# EAGLE board WiiSPii_Rev1.4 (EAGLE 9.6.1), part 1 of 2
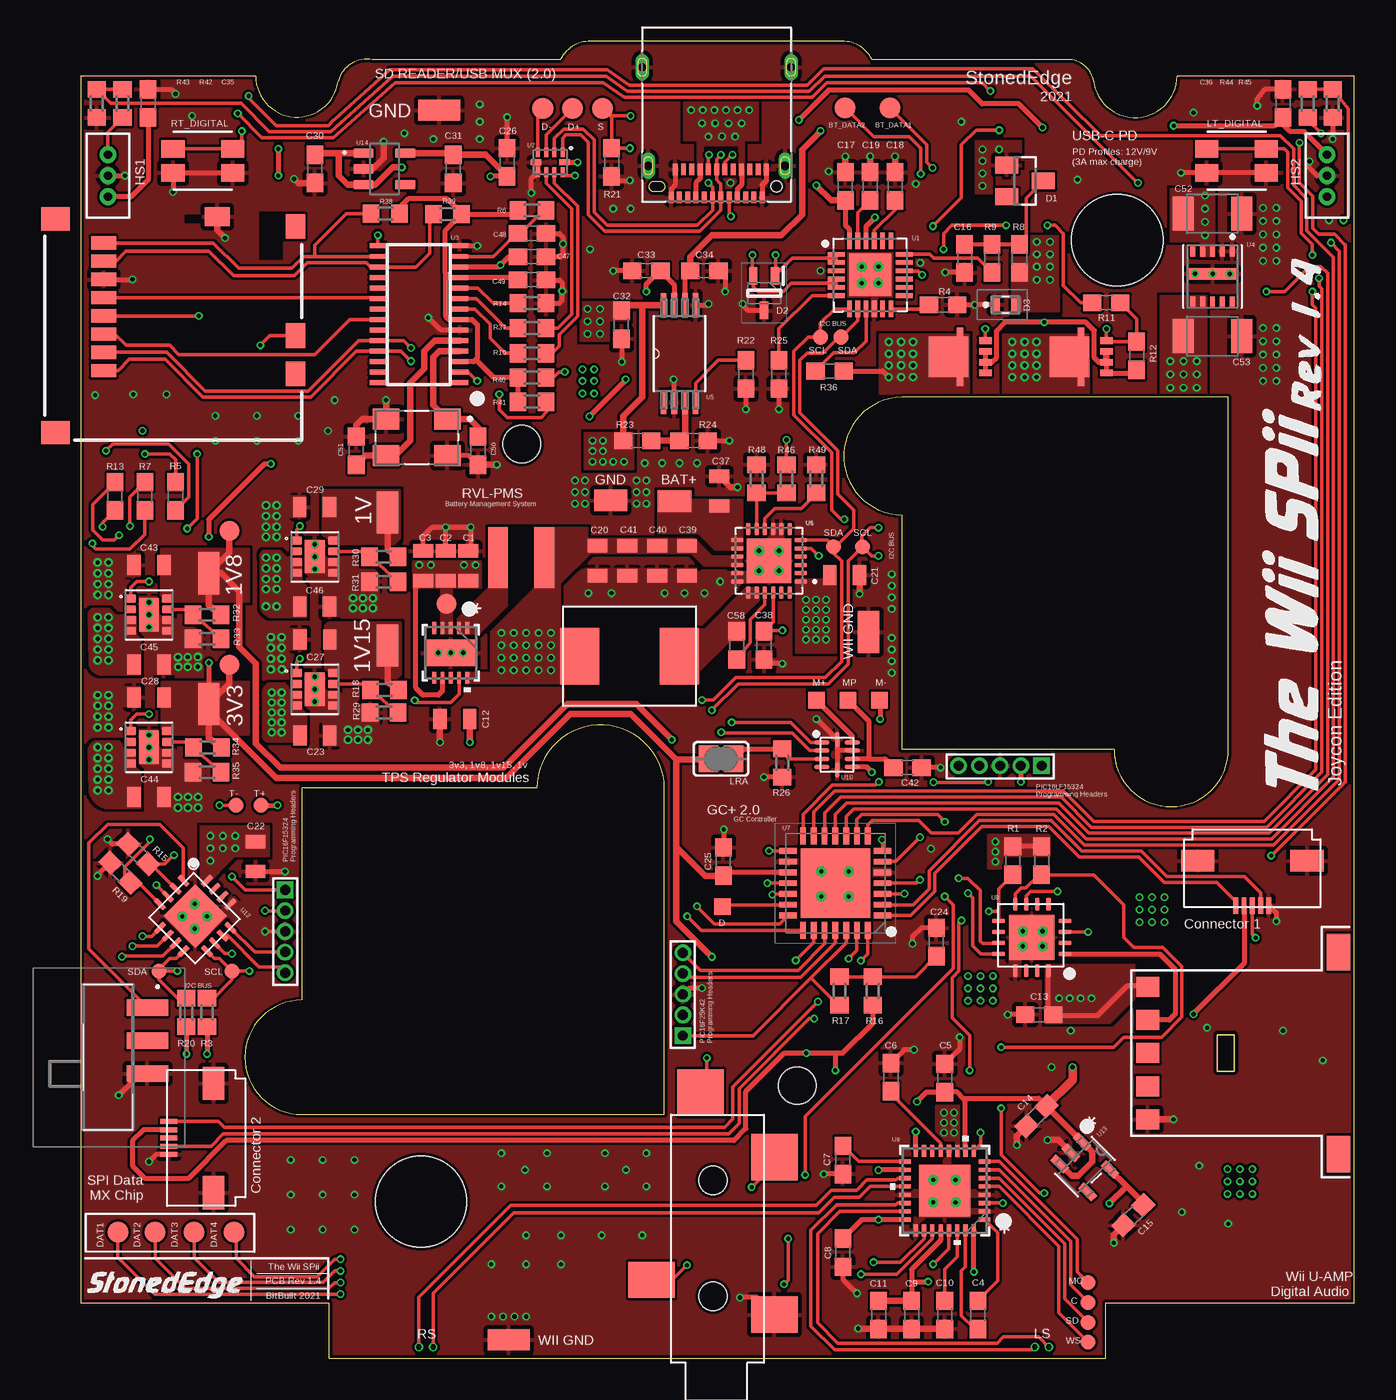
[diagram p0: board, top side]
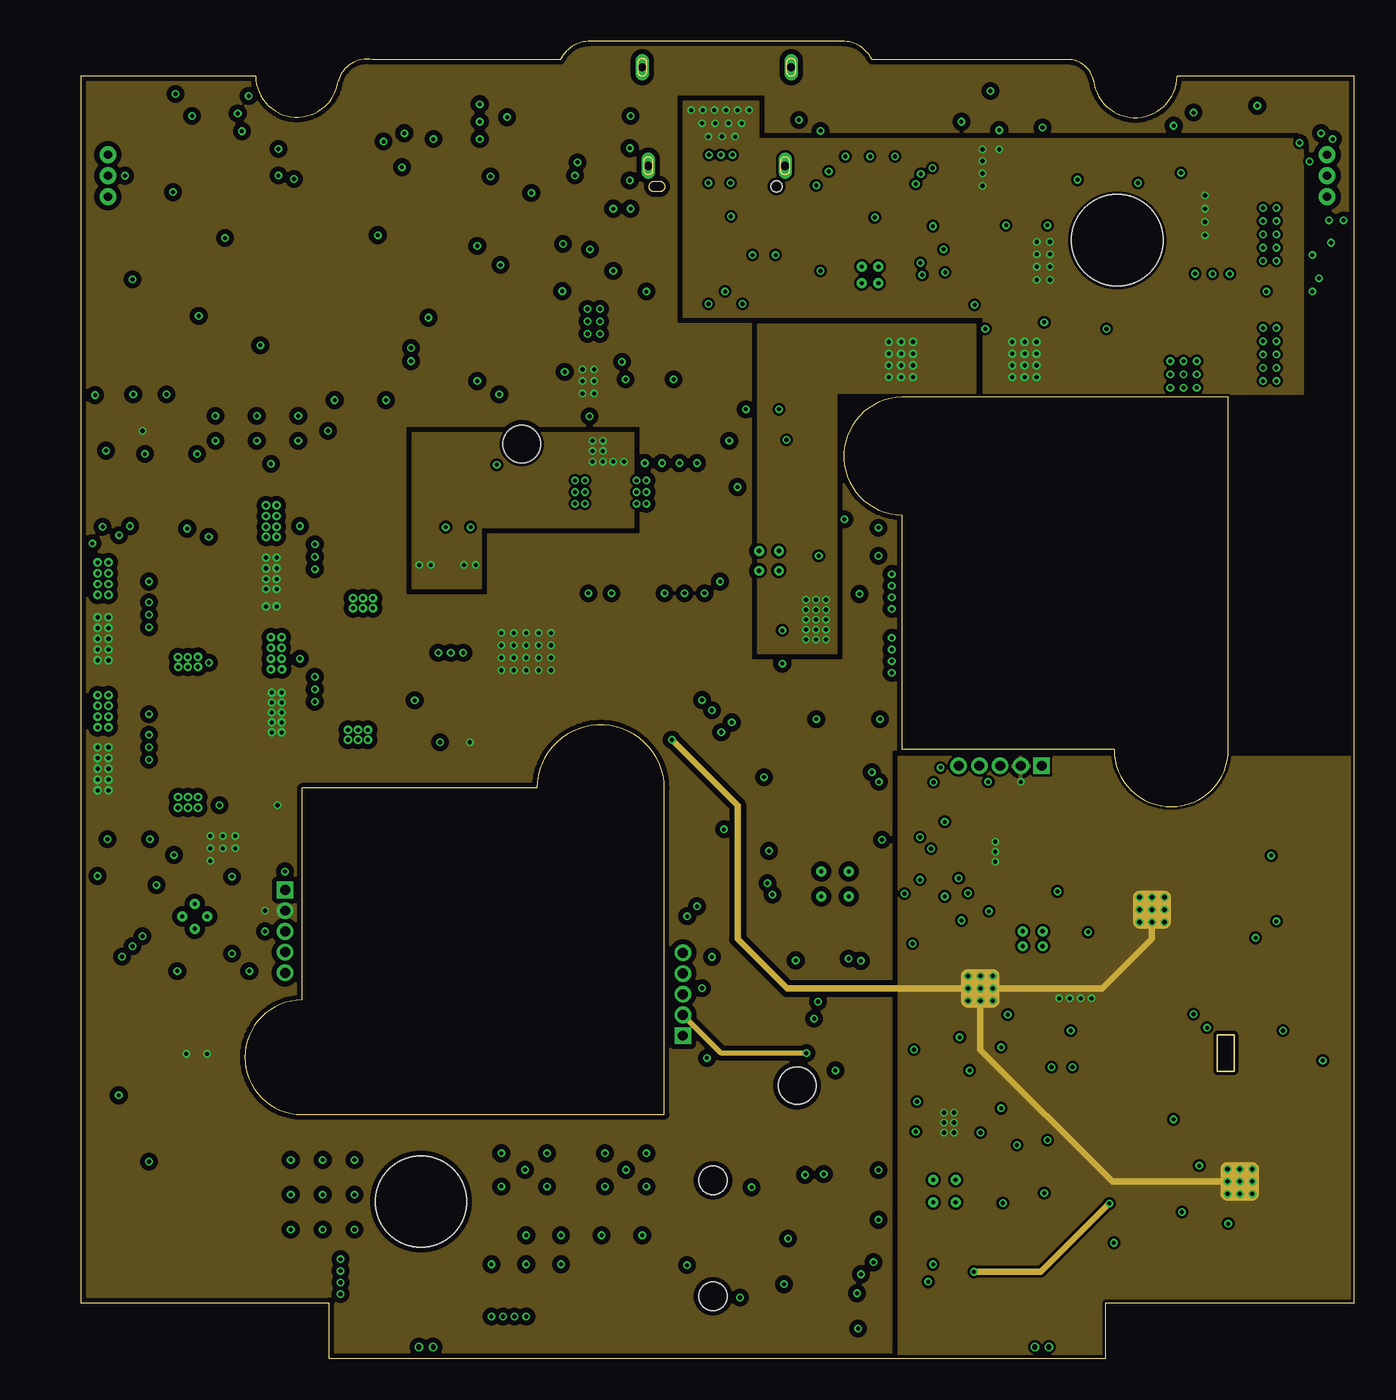
[diagram p1: board, inner layer Route2]
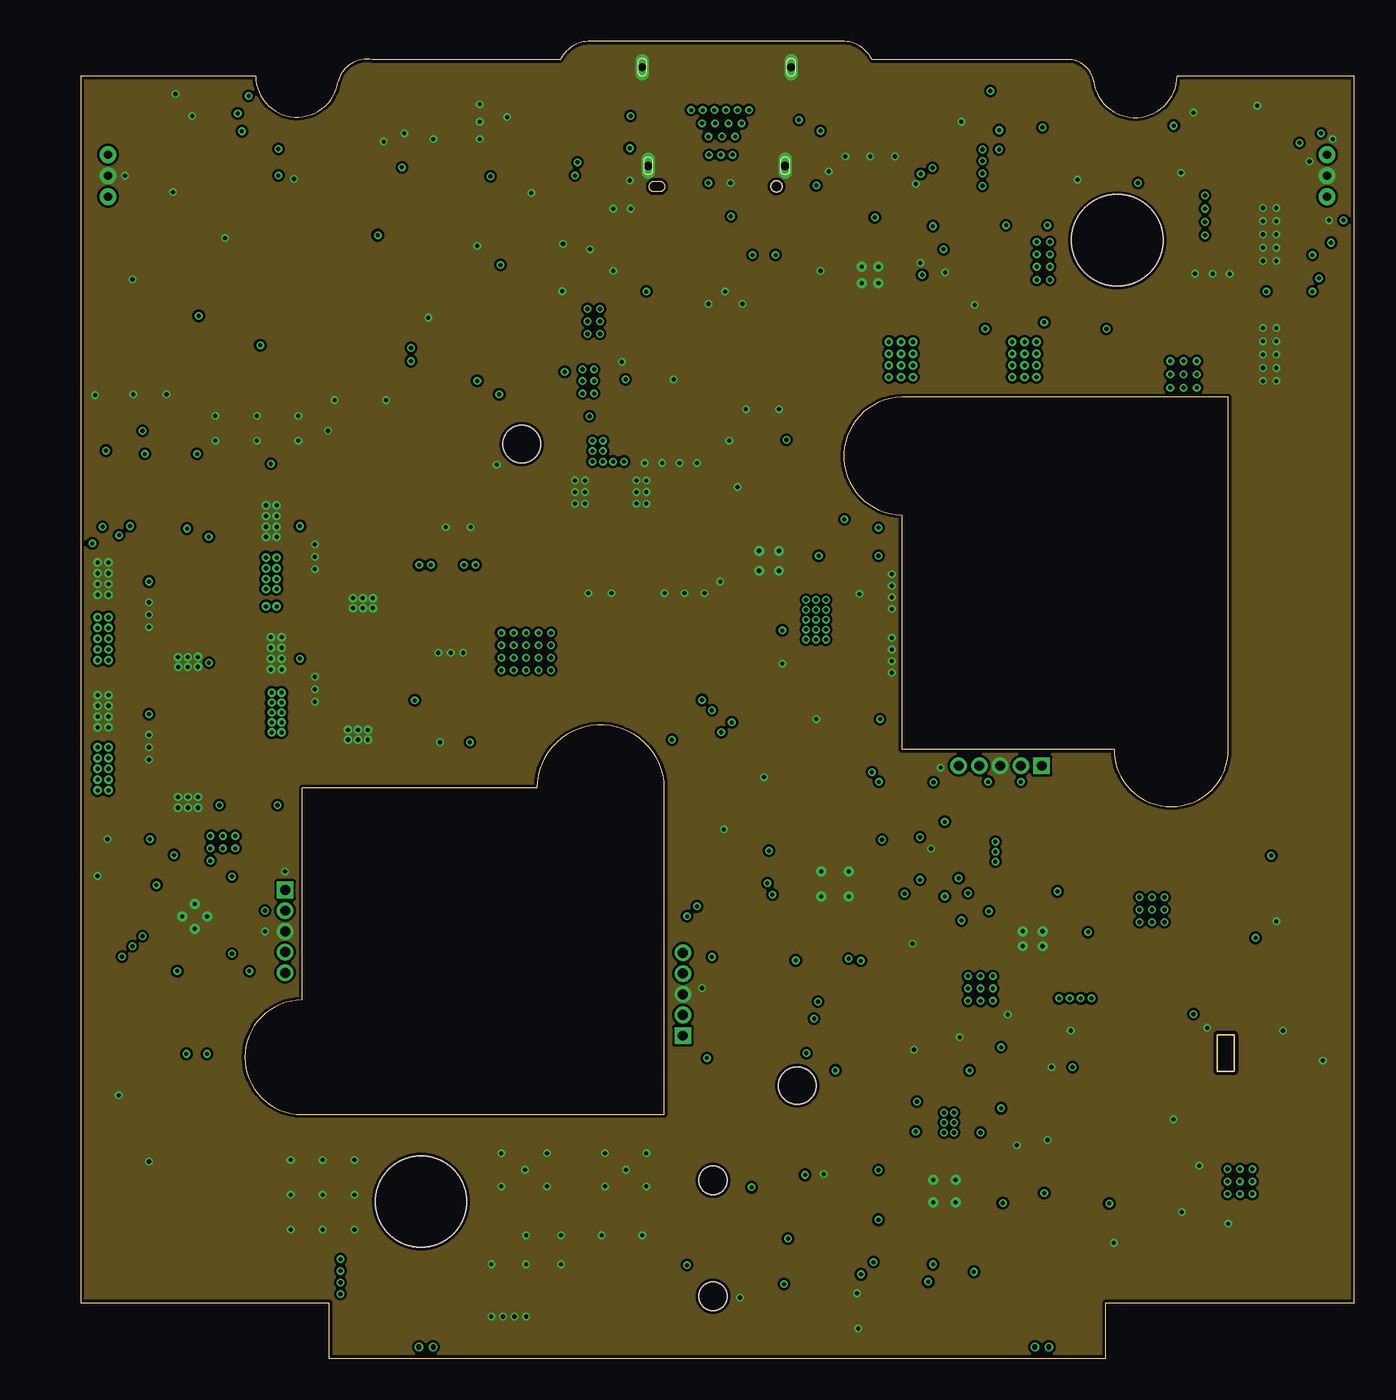
[diagram p2: board, inner layer Route15]
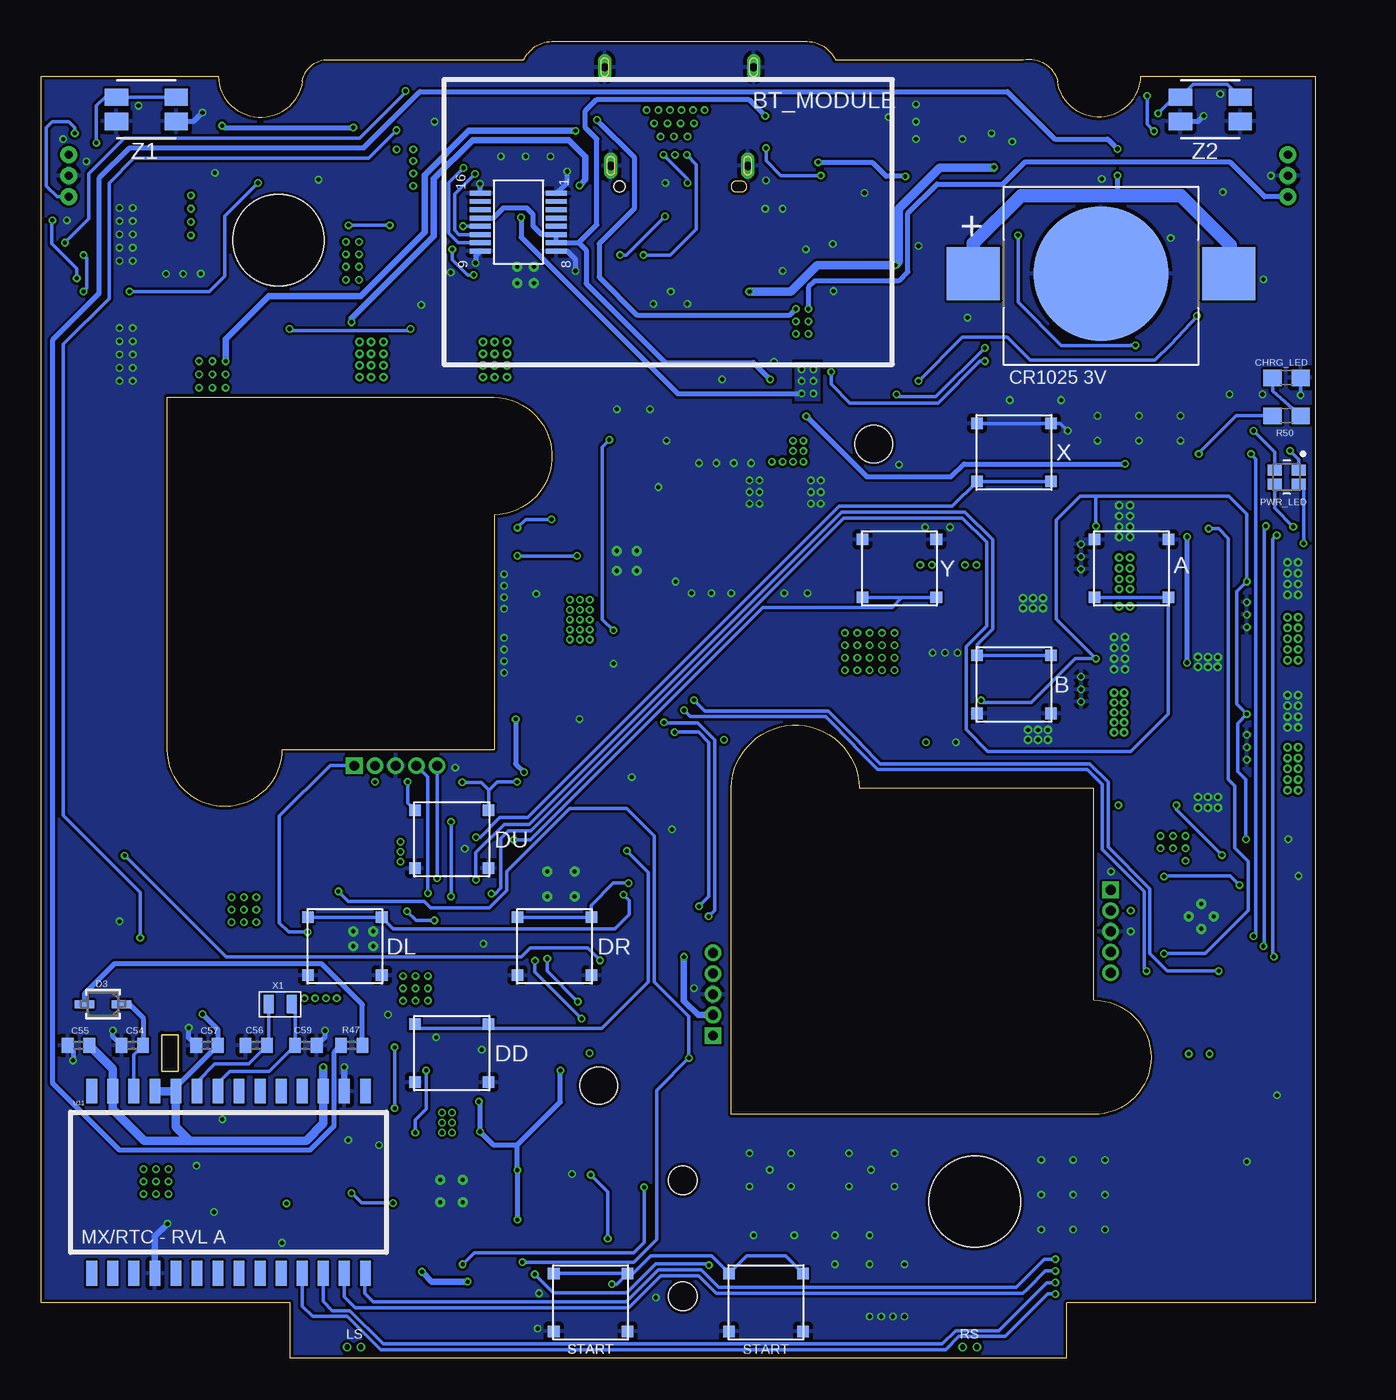
[diagram p3: board, bottom side, seen from below]

Size 76.84 x 79.45 mm. Coordinates in mm from the lower left corner, seen from the top.
Outline: 46.06,79.45 30.63,79.45 arc49 29.31,78.85 arc26 28.94,78.35 17.6,78.35 arc86 15.54,77.06 arc-172 10.55,77.36 0,77.36 0,3.35 15,3.35 15,0 61.84,0 61.84,3.35 76.84,3.35 76.84,77.36 66.14,77.36 arc-172 61.1,77.06 arc86 59.37,78.35 47.74,78.35 arc26 47.38,78.85
Outline: 47.38,78.85 arc49 46.06,79.45
Outline: 47.38,78.85 arc49 46.06,79.45
Outline: 62.34,36.72 49.54,36.72 49.54,50.87 arc-178 49.54,57.97 69.24,57.97 69.24,36.72 arc-180 62.34,36.72
Outline: 13.35,21.6 13.35,34.4 27.5,34.4 arc-178 35.22,34.4 35.22,14.7 13.35,14.7 arc-180 13.35,21.6
Copper layers (1+2*15+16): Top 0.035mm / dielectric 0.2mm / Route2 0.0175mm / dielectric 1.065mm / Route15 0.0175mm / dielectric 0.2mm / Bottom 0.035mm
Design rules "default *": minimum track width 6mil, minimum drill 0.2mm, track to track 6mil, track to pad 0.2mm, pad to pad 6mil, via to via 6mil, smd to smd 6mil, copper to edge 0.2mm, drill to drill 6mil, minimum pad ring 4mil, minimum via ring 4mil, stop-mask expansion 0mil, vias tented up to drill 15mil, thermal gap 10mil
Net classes: 1 USB 2.0 Differential Pair: width 0.114 mm
Holes 5.5 mm at 20.54,9.45 62.54,67.45
Holes 2.25 mm at 43.22,16.44 26.62,55.16
tRestrict: area 29.2,39.5 to 37,45.3; area 25.9,46.5 to 27.3,50.3

## Footprints (pad centres in the part's own frame; a part is rotated, then mirrored left to right if it is on the bottom)
SMD1,27-2,54 = smd 1.27 x 2.54: 1 0,0
TP12R = smd 1.2 x 1.2: TP 0,0
TL3315NF100Q = smd 0.7 x 0.7: 1 -2.225,1.75; 2 2.225,1.75; 3 -2.225,-1.75; 4 2.225,-1.75
B1,27 = smd 1.27 x 1.27: TP 0,0
TP09R = smd 0.9 x 0.9: TP 0,0
0805 = smd 0.8 x 1.2: 1 -0.9,0; 2 0.9,0
0603 = smd 1.1 x 1: 1 -0.85,0; 2 0.85,0
C0603 = smd 1.1 x 1: 1 -0.85,0; 2 0.85,0
1210 = smd 1.27 x 2.06: 1 -1.755,0; 2 1.755,0
C0402 = smd 0.7 x 0.9: 1 -0.65,0; 2 0.65,0
SOD-323_STM = smd 1.168 x 0.483: 1 -1.118,0; 2 1.118,0
SOT23 = smd 1 x 1.4: 1 -0.95,-1.1; 2 0.95,-1.1; 3 0,1.1
SOT65P210X110-3N = smd 1.05 x 0.5: 1 -1.05,0.65; 2 -1.05,-0.65; 3 1.05,0
ESDA8P801U1M = smd 0.55 x 0.8: 1 -0.625,0; 2 0.625,0
LED_LTST-C19HE1WT = smd 0.65 x 0.85: 1 -0.425,0.725; 2 0.425,0.725; 3 0.425,-0.725; 4 -0.425,-0.725
TP10SQ = smd 1 x 1: TP 0,0
MLX90290 = drill 0.5 pad 1.016: P$1 -1.27,0; P$2 0,0; P$3 1.27,0
MPD_BK-870 = smd 3.2 x 3.2: 1 -7.695,0; 3 7.695,0 | smd 8.13 x 8.13: 2 0,0
AMPHENOL_12401598E4#2A = smd 0.3 x 0.7: A1 -2.75,0.66; A2 -2.25,0.66; A3 -1.75,0.66; A4 -1.25,0.66; A5 -0.75,0.66; A6 -0.25,0.66; A7 0.25,0.66; A8 0.75,0.66; A9 1.25,0.66; A10 1.75,0.66; A11 2.25,0.66; A12 2.75,0.66; B1 2.5,-1.04; B2 2,-1.04; B3 1.5,-1.04; B4 1,-1.04; B5 0.5,-1.04; B6 0,-1.04; B7 -0.5,-1.04; B8 -1,-1.04; B9 -1.5,-1.04; B10 -2,-1.04; B11 -2.5,-1.04; B12 -3,-1.04 | drill 0.5 pad 0.8 long: SH1 -4.13,-1.25; SH2 -4.49,-7.2; SH3 4.49,-7.2; SH4 4.13,-1.25 | hole 0.65: -3.6,0
MOLEX_5025700893 = smd 0.8 x 1.5: 1 -2.7,4.2; 2 -1.6,4.2; 3 -0.5,4.2; 4 0.6,4.2; 5 1.7,4.2; 6 2.8,4.2; 7 3.9,4.2; 8 5,4.2 | smd 1.15 x 1.5: 9 6.575,-2.65 | smd 1.5 x 1.15: 10 -0.6,-7.375; P$3 -2.9,-7.375; P$5 6,-7.375 | smd 1.4 x 1.7: P$1 -6.45,7.1; P$2 6.45,7.1
SJ = smd 1.168 x 1.6: 1 -0.762,0; 2 0.762,0
R0603 = smd 1 x 1.1: 1 -0.85,0; 2 0.85,0
R0402 = smd 0.7 x 0.9: 1 -0.65,0; 2 0.65,0
WII_VIA = drill 0.305 pad 0.406: 1 0,0
JSM08011SAQNR = smd 1 x 2.5: 1 -3,2.375; 2 -1,2.375; 3 1,2.375
QFN50P440X440X100-25T255 = smd 1.012 x 0.282: 1 -2.05,1.25; 2 -2.05,0.75; 3 -2.05,0.25; 4 -2.05,-0.25; 5 -2.05,-0.75; 6 -2.05,-1.25; 13 2.05,-1.25; 14 2.05,-0.75; 15 2.05,-0.25; 16 2.05,0.25; 17 2.05,0.75; 18 2.05,1.25 | smd 0.282 x 1.012: 7 -1.25,-2.05; 8 -0.75,-2.05; 9 -0.25,-2.05; 10 0.25,-2.05; 11 0.75,-2.05; 12 1.25,-2.05; 19 1.25,2.05; 20 0.75,2.05; 21 0.25,2.05; 22 -0.25,2.05; 23 -0.75,2.05; 24 -1.25,2.05 | smd 2.55 x 2.55: 25 0,0
SQA32A-L = smd 0.711 x 0.254: 1 -2.4,1.75; 2 -2.4,1.25; 3 -2.4,0.75; 4 -2.4,0.25; 5 -2.4,-0.25; 6 -2.4,-0.75; 7 -2.4,-1.25; 8 -2.4,-1.75; 17 2.4,-1.75; 18 2.4,-1.25; 19 2.4,-0.75; 20 2.4,-0.25; 21 2.4,0.25; 22 2.4,0.75; 23 2.4,1.25; 24 2.4,1.75 | smd 0.254 x 0.711: 9 -1.75,-2.4; 10 -1.25,-2.4; 11 -0.75,-2.4; 12 -0.25,-2.4; 13 0.25,-2.4; 14 0.75,-2.4; 15 1.25,-2.4; 16 1.75,-2.4; 25 1.75,2.4; 26 1.25,2.4; 27 0.75,2.4; 28 0.25,2.4; 29 -0.25,2.4; 30 -0.75,2.4; 31 -1.25,2.4; 32 -1.75,2.4 | smd 3.099 x 3.099: 33 0,0
QFN65P600X600X100-29N = smd 1.05 x 0.35: 1 -2.85,1.95; 2 -2.85,1.3; 3 -2.85,0.65; 4 -2.85,0; 5 -2.85,-0.65; 6 -2.85,-1.3; 7 -2.85,-1.95; 15 2.85,-1.95; 16 2.85,-1.3; 17 2.85,-0.65; 18 2.85,0; 19 2.85,0.65; 20 2.85,1.3; 21 2.85,1.95 | smd 0.35 x 1.05: 8 -1.95,-2.85; 9 -1.3,-2.85; 10 -0.65,-2.85; 11 0,-2.85; 12 0.65,-2.85; 13 1.3,-2.85; 14 1.95,-2.85; 22 1.95,2.85; 23 1.3,2.85; 24 0.65,2.85; 25 0,2.85; 26 -0.65,2.85; 27 -1.3,2.85; 28 -1.95,2.85 | smd 4.2 x 4.2: 29 0,0
XC6204/05_SOT-25 = smd 1.118 x 0.483: 1 -1.194,0.95; 2 -1.194,0; 3 -1.194,-0.95; 4 1.194,-0.95; 5 1.194,0.95
QFN-10-RSE = smd 0.58 x 0.25: 1 -0.6,0.75; 2 -0.6,0.25; 3 -0.6,-0.25; 4 -0.6,-0.75; 6 0.6,-0.75; 7 0.6,-0.25; 8 0.6,0.25; 9 0.6,0.75 | smd 0.35 x 0.63: 5 0,-0.85; 10 0,0.85
SOT95P280X145-5N = smd 1.21 x 0.59: 1 -1.255,0.95; 2 -1.255,0; 3 -1.255,-0.95; 4 1.255,-0.95; 5 1.255,0.95
DRC_S-PVSON-N10 = smd 0.706 x 0.225: 1 -1.496,1; 2 -1.496,0.5; 3 -1.496,0; 4 -1.496,-0.5; 5 -1.496,-1; 6 1.496,-1; 7 1.496,-0.5; 8 1.496,0; 9 1.496,0.5; 10 1.496,1 | smd 1.6 x 3.099: 11 0,0
SOP65P640X120-8N = smd 1.473 x 0.356: 1 -2.921,0.965; 2 -2.921,0.33; 3 -2.921,-0.33; 4 -2.921,-0.965; 5 2.921,-0.965; 6 2.921,-0.33; 7 2.921,0.33; 8 2.921,0.965
VQFN50P400X400X100-24N = smd 0.74 x 0.26: 1 -1.92,1.25; 2 -1.92,0.75; 3 -1.92,0.25; 4 -1.92,-0.25; 5 -1.92,-0.75; 6 -1.92,-1.25; 13 1.92,-1.25; 14 1.92,-0.75; 15 1.92,-0.25; 16 1.92,0.25; 17 1.92,0.75; 18 1.92,1.25 | smd 0.26 x 0.74: 7 -1.25,-1.92; 8 -0.75,-1.92; 9 -0.25,-1.92; 10 0.25,-1.92; 11 0.75,-1.92; 12 1.25,-1.92; 19 1.25,1.92; 20 0.75,1.92; 21 0.25,1.92; 22 -0.25,1.92; 23 -0.75,1.92; 24 -1.25,1.92 | smd 2.7 x 2.7: 25 0,0
GL827L_SSOP = smd 1 x 0.3: 1 0,0; 2 0,-0.635; 3 0,-1.27; 4 0,-1.905; 5 0,-2.54; 6 0,-3.175; 7 0,-3.81; 8 0,-4.445; 9 0,-5.08; 10 0,-5.715; 11 0,-6.35; 12 0,-6.985; 13 0,-7.62; 14 0,-8.255; 15 4.95,-8.255; 16 4.95,-7.62; 17 4.95,-6.985; 18 4.95,-6.35; 19 4.95,-5.715; 20 4.95,-5.08; 21 4.95,-4.445; 22 4.95,-3.81; 23 4.95,-3.175; 24 4.95,-2.54; 25 4.95,-1.905; 26 4.95,-1.27; 27 4.95,-0.635; 28 4.95,0
WQFN-10 = smd 0.28 x 0.95: 1 -0.75,-0.925; 2 -0.25,-0.925; 3 0.25,-0.925; 4 0.75,-0.925; 6 0.75,0.925; 7 0.25,0.925; 8 -0.25,0.925; 9 -0.75,0.925 | smd 0.95 x 0.28: 5 0.925,0; 10 -0.925,0
AUDIO_AMP_PIC = smd 0.8 x 0.3: ICSPCLK 2,0.333; ICSPDAT 2,1; MCLR -2,-0.333; RA2 2,-0.333; RA4 -2,0.333; RA5 -2,1; RC0 2,-1; RC5 -2,-1 | smd 0.3 x 0.8: NC-0 0.333,2; NC-1 -0.333,2; RC1 1,-2; RC2 0.333,-2; RC3 -0.333,-2; RC4 -1,-2; VDD -1,2; VSS 1,2 | smd 2.7 x 2.7: THERM 0,0
INDUCTOR_SMALL = smd 1.2 x 3.7: 1 -1.4,0; 2 1.4,0
1MM_PIC-PROGRAMING_HEADER = drill 0.6 pad 1 square: 1 -1.25,1 | drill 0.6 pad 1: 2 0,1; 3 1.25,1; 4 2.5,1; 5 3.75,1
SWITCHSTICK_BREAKOUT = smd 0.3 x 1: 1 0,0; 2 0.5,0; 3 1,0; 4 1.5,0; 5 2,0 | smd 2 x 1.3: SHIELD -2.3,-2.7; SHIELD1 4.3,-2.7
SON65P280X300X133-9N = smd 0.63 x 0.5: 1 -1.1,0.975; 2 -1.1,0.325; 3 -1.1,-0.325; 4 -1.1,-0.975; 5 1.1,-0.975; 6 1.1,-0.325; 7 1.1,0.325; 8 1.1,0.975 | smd 1.2 x 2: 9 0,0 | drill 0.254: P$1 0,0; P$2 0,0.75; P$3 0,-0.75
RK10J11R001Y = smd 1.2 x 1.4: 1 -4,-11.5; 2 -2,-11.5; 3 4,-11.5; NC1 0,-11.5; NC2 2,-11.5 | smd 2.2 x 1.4: NC3 -6.1,0; NC4 6.1,0
MODULE_LMZM23600SILR = smd 0.65 x 0.3: 1 -1.525,1.2; 2 -1.525,0.6; 3 -1.525,0; 4 -1.525,-0.6; 5 -1.525,-1.2; 6 1.525,-1.2; 7 1.525,-0.6; 8 1.525,0; 9 1.525,0.6; 10 1.525,1.2 | smd 0.7 x 2.9: 11 -0.175,0
EVQ-P7J01P = smd 1.4 x 1.05: 1 -1.8,0.725; 2 1.8,0.725; 3 -1.8,-0.725; 4 1.8,-0.725
MOLEX_0541020164MOLEX = smd 0.3 x 1.27: 1 -1.746,2.286; 2 -1.246,2.286; 3 -0.746,2.286; 4 -0.246,2.286; 5 0.254,2.286; 6 0.754,2.286; 7 1.254,2.286; 8 1.754,2.286; 9 1.754,-2.314; 10 1.254,-2.314; 11 0.754,-2.314; 12 0.254,-2.314; 13 -0.246,-2.314; 14 -0.746,-2.314; 15 -1.246,-2.314; 16 -1.746,-2.314
MX_WII = smd 1.5 x 0.65: 1 -5.08,8.255; 2 -5.08,6.985; 3 -5.08,5.715; 4 -5.08,4.445; 5 -5.08,3.175; 6 -5.08,1.905; 7 -5.08,0.635; 8 -5.08,-0.635; 9 -5.08,-1.905; 10 -5.08,-3.175; 11 -5.08,-4.445; 12 -5.08,-5.715; 13 -5.08,-6.985; 14 -5.08,-8.255; 15 5.92,-8.255; 16 5.92,-6.985; 17 5.92,-5.715; 18 5.92,-4.445; 19 5.92,-3.175; 20 5.92,-1.905; 21 5.92,-0.635; 22 5.92,0.635; 23 5.92,1.905; 24 5.92,3.175; 25 5.92,4.445; 26 5.92,5.715; 27 5.92,6.985; 28 5.92,8.255
TFE20 = smd 0.6 x 1.1: P$1 -0.7,0; P$2 0.7,0
VOLTAGE_PAD = smd 2 x 1.3: 1 0,0
HP_JACK = smd 2.2 x 2.8: HP_1 0,0; HP_3 2.1,7.4 | smd 2.8 x 2.8: HP_2 9.5,0; HP_4 13.4,4.45 | hole 1.7: 1.1,3.7; 8.1,3.7
POWERFLAT_3.3X3.3 = smd 0.4 x 0.75: 1 -0.975,0; 2 -0.325,0; 3 0.325,0; 4 0.975,0 | smd 0.53 x 0.4: 5 1.49,1.525; 7 -1.49,1.525 | smd 2.45 x 2.4: 6 0,2.225
INDUCTOR_BIG = smd 2.35 x 3.4: 1 -3,0; 2 3,0
XTAL_ECS-120-13-30B-AEM-TR = smd 1.6 x 1.25: 1 -1.85,-1.1; 2 1.85,-1.1; 3 1.85,1.1; 4 -1.85,1.1

## Placement (x,y rotation side)
1V  [SMD1,27-2,54]  18.51,51.02 180 top
1V8  [SMD1,27-2,54]  7.73,47.36 180 top
1V15  [SMD1,27-2,54]  18.51,43.01 180 top
3V3  [SMD1,27-2,54]  7.73,39.46 180 top
3V3_SCREEN  PTR1TP12R  [TP12R]  8.98,41.83 0 top
A  TL3315NF100Q  [TL3315NF100Q]  11.08,47.65 0 bottom
B  TL3315NF100Q  [TL3315NF100Q]  18.17,40.65 180 bottom
BT_DATA1  TPSQB1,27  [B1,27]  48.81,75.44 0 top
BT_DATA2  TPSQB1,27  [B1,27]  46.11,75.44 0 top
C  PTR1TP09R  [TP09R]  60.78,3.36 0 top
C1  22uF  [0805]  23.38,47.81 90 top
C2  22uF  [0805]  22.03,47.81 90 top
C3  22uF  [0805]  20.68,47.81 90 top
C4  2.2uF  [0603]  54.13,2.61 90 top
C5  2.2uF  [0603]  52.13,16.91 270 top
C6  10uF  [0603]  48.88,16.95 270 top
C7  2.2uF  [0603]  45.98,11.96 90 top
C8  2.2uF  [0603]  45.98,6.36 90 top
C9  2.2uF  [0603]  50.13,2.61 270 top
C10  2.2uF  [0603]  52.13,2.61 270 top
C11  2.2uF  [0603]  48.13,2.61 270 top
C12  1.0uF  [0805]  22.58,38.56 180 top
C13  0.1uF  [0603]  57.83,20.73 180 top
C14  1uF  [0603]  57.66,14.61 225 top
C15  1uF  [0603]  63.5,8.62 225 top
C16  1.0uF  [0603]  53.33,66.36 90 top
C17  1.0uF  [0603]  46.13,70.71 270 top
C18  1.0uF  [0603]  49.13,70.71 270 top
C19  1.0uF  [0603]  47.63,70.71 270 top
C20  10uF  [0805]  31.18,48.11 90 top
C21  1.0uF  [0805]  46.09,47.24 180 top
C22  1.0uF  [0805]  10.55,30.26 270 top
C23  10uF  [0805]  14.13,37.56 180 top
C24  0.1uF  [C0603]  51.63,25.11 90 top
C25  0.1uF  [C0603]  38.78,29.96 90 top
C26  0.1uF  [0603]  25.73,72.16 270 top
C27  22uF  [0805]  14.13,43.36 0 top
C28  10uF  [0805]  4.13,41.86 180 top
C29  22uF  [0805]  14.11,51.36 0 top
C30  1.0uF  [0603]  14.13,71.76 90 top
C31  1.0uF  [0603]  22.48,71.76 90 top
C32  0.1uF  [0603]  32.63,62.36 90 top
C33  1.0uF  [0603]  34.13,65.61 0 top
C34  0.1uF  [0603]  37.63,65.61 0 top
C35  0.1uF  [C0603]  4.08,75.71 270 top
C36  0.1uF  [C0603]  72.53,75.71 270 top
C37  10uF  [0805]  38.53,52.31 270 top
C38  4.7uF  [C0603]  41.23,43.01 90 top
C39  10uF  [0805]  36.58,48.11 90 top
C40  10uF  [0805]  34.78,48.11 90 top
C41  10uF  [0805]  32.98,48.11 90 top
C42  0.1uF  [C0603]  49.88,35.63 0 top
C43  22uF  [0805]  4.13,47.86 0 top
C44  10uF  [0805]  4.13,33.86 180 top
C45  22uF  [0805]  4.13,39.86 0 top
C46  10uF  [0805]  14.11,45.36 180 top
C47  100nF  [C0603]  27.23,66.46 0 top
C48  100nF  [C0603]  27.23,67.86 0 top
C49  100nF  [C0603]  27.23,65.06 0 top
C50  22pF  [C0603]  23.98,54.76 90 top
C51  22pF  [C0603]  16.63,54.76 270 top
C52  10uF  [1210]  68.28,69.06 180 top
C53  22uF  [1210]  68.28,61.66 0 top
C54  0.1uF  [C0402]  71.35,18.87 0 bottom
C55  0.1uF  [C0402]  74.6,18.87 0 bottom
C56  5pF  [C0402]  63.87,18.87 180 bottom
C57  0.1uF  [C0402]  66.85,18.87 0 bottom
C58  0.047uF  [C0603]  39.58,43.01 270 top
C59  5pF  [C0402]  60.88,18.87 0 bottom
CHRG_LED  261  [0603]  1.73,59.16 0 bottom
CHRG_RESISTOR  261  [0603]  1.73,56.86 0 bottom
CR1  BAT60JFILM  [SOD-323_STM]  73.13,21.35 180 bottom
D1  BAT54  [SOT23]  56.97,71.03 270 top
D2  ESDA25W  [SOT65P210X110-3N]  41.23,64.26 270 top
D3  ESDA25P35-1U1M  [ESDA8P801U1M]  55.8,63.56 0 top
D4  LTST-C19HE1WT  [LED_LTST-C19HE1WT]  1.73,53.16 270 bottom
D+  TPB1,27  [B1,27]  29.68,75.41 180 top
D-  TPB1,27  [B1,27]  27.88,75.41 180 top
DAT1  TPB1,27  [B1,27]  2.25,7.59 90 top
DAT2  TPB1,27  [B1,27]  4.5,7.59 90 top
DAT3  TPB1,27  [B1,27]  6.85,7.59 90 top
DAT4  TPB1,27  [B1,27]  9.25,7.59 90 top
DATA  TPTP10SQ  [TP10SQ]  38.73,27.25 180 top
DD  TL3315NF100Q  [TL3315NF100Q]  52.09,18.4 180 bottom
DL  TL3315NF100Q  [TL3315NF100Q]  58.54,24.85 180 bottom
DR  TL3315NF100Q  [TL3315NF100Q]  45.89,24.85 180 bottom
DU  TL3315NF100Q  [TL3315NF100Q]  52.09,31.3 180 bottom
GND  [SMD1,27-2,54]  21.63,75.31 90 top
GND(WII)  [SMD1,27-2,54]  47.53,43.81 180 top
GND(WII)1  [SMD1,27-2,54]  25.83,1.11 90 top
HS1  MLX90290  [MLX90290]  1.65,71.35 90 top
HS2  MLX90290  [MLX90290]  75.19,71.35 270 top
J1  BK-870  [MPD_BK-870]  12.92,65.43 0 bottom
J2  12401598E4#2A  [AMPHENOL_12401598E4#2A]  38.37,70.69 180 top
J3  5025700893  [MOLEX_5025700893]  5.59,62.29 90 top
LRA  [SJ]  38.63,36.16 180 top
M+  TPTP10SQ  [TP10SQ]  44.38,39.71 180 top
M-  TPTP10SQ  [TP10SQ]  48.18,39.71 180 top
MC  PTR1TP09R  [TP09R]  60.78,4.56 0 top
MP  TPTP10SQ  [TP10SQ]  46.28,39.71 180 top
R1  10k  [0603]  56.23,30.02 270 top
R2  10k  [0603]  57.97,30.02 270 top
R3  4.7K  [R0603]  7.63,20.86 270 top
R4  100k  [0603]  52.03,63.56 180 top
R5  1.2K  [0603]  5.73,52.01 90 top
R6  10K  [R0603]  27.23,69.26 180 top
R7  1.2K  [0603]  3.88,52.01 90 top
R8  1k  [0603]  54.98,66.36 90 top
R9  470  [0603]  56.63,66.36 270 top
R10  22  [R0603]  27.23,60.63 0 top
R11  10K  [0603]  61.87,63.68 0 top
R12  100k  [0603]  63.7,60.49 270 top
R13  1.2K  [0603]  2.08,52.01 90 top
R14  1K  [R0603]  27.23,63.66 180 top
R15  10K  [0603]  3.47,30.42 315 top
R16  10kOhm  [R0603]  47.78,22.16 270 top
R17  100Ohm  [R0603]  45.77,22.16 270 top
R18  73K  [R0603]  18.33,40.31 0 top
R19  1k  [0603]  2.39,29.29 315 top
R20  4.7K  [R0603]  6.38,20.86 270 top
R21  100k  [0603]  32.03,72.16 270 top
R22  250  [0603]  40.13,59.36 270 top
R23  100k  [0603]  33.58,55.36 0 top
R24  50k  [0603]  36.98,55.36 0 top
R25  100k  [0603]  42.13,59.36 90 top
R26  10kOhm  [R0603]  42.33,35.91 90 top
R29  162K  [R0603]  18.31,38.96 0 top
R30  43K  [R0603]  18.29,48.35 0 top
R31  162K  [R0603]  18.29,46.85 0 top
R32  205k  [R0603]  7.63,44.86 0 top
R33  162K  [R0603]  7.63,43.41 0 top
R34  510K  [R0603]  7.65,36.85 0 top
R35  162K  [R0603]  7.63,35.36 0 top
R36  1K  [0603]  45.18,59.56 0 top
R37  22  [R0603]  27.23,62.16 0 top
R38  10K  [R0603]  18.38,69.06 0 top
R39  10K  [R0603]  22.13,69.03 0 top
R40  10K  [R0603]  27.23,59.16 180 top
R41  10K  [R0603]  27.23,57.71 180 top
R42  10k  [R0603]  2.53,75.71 270 top
R43  20k  [R0603]  0.98,75.71 90 top
R44  10k  [R0603]  74.03,75.71 270 top
R45  20k  [R0603]  75.53,75.71 90 top
R46  10kOhm  [R0603]  42.58,53.06 90 top
R47  100K  [R0402]  58.13,18.87 0 bottom
R48  10kOhm  [R0603]  40.78,53.06 90 top
R49  10kOhm  [R0603]  44.38,53.06 90 top
RS+  WII_VIA  [WII_VIA]  58.4,0.67 180 bottom
S  TPB1,27  [B1,27]  31.48,75.41 180 top
S1  JSM08011SAQNR  [JSM08011SAQNR]  1.65,18.16 270 top
SCL  PTR1TP09R  [TP09R]  44.63,61.61 0 top
SD  PTR1TP09R  [TP09R]  60.78,2.16 0 top
SDA  PTR1TP09R  [TP09R]  45.88,61.61 0 top
START  TL3315NF100Q  [TL3315NF100Q]  33.13,3.36 180 bottom
START2  TL3315NF100Q  [TL3315NF100Q]  43.71,3.36 180 bottom
T+  PTR1TP09R  [TP09R]  10.88,33.36 0 top
T-  PTR1TP09R  [TP09R]  9.38,33.36 0 top
TP1  PTR1TP09R  [TP09R]  4.72,23.36 0 top
TP2  PTR1TP09R  [TP09R]  9.13,23.36 0 top
TP3  PTR1TP09R  [TP09R]  45.43,48.96 0 top
TP4  PTR1TP09R  [TP09R]  47.18,48.96 0 top
TP6  PTR1TP12R  [TP12R]  8.98,49.93 0 top
TP7  PTR1TP12R  [TP12R]  22.08,45.51 0 top
U0  STUSB4500  [QFN50P440X440X100-25T255]  47.63,65.36 0 top
U1  LM49450SQ/NOPBSQA32A-L  [SQA32A-L]  52.13,10.11 180 top
U2  PIC18F25K42-I_ML  [QFN65P600X600X100-29N]  45.53,28.66 180 top
U3  XC6204B252MR-G  [XC6204/05_SOT-25]  60.57,11.54 315 top
U4  TS3USB221A  [QFN-10-RSE]  28.33,72.16 270 top
U5  LD3985G33R  [SOT95P280X145-5N]  18.33,71.76 0 top
U6  TPS61232DRCR  [DRC_S-PVSON-N10]  22.33,42.56 270 top
U7  TPS2111APW  [SOP65P640X120-8N]  36.13,60.61 90 top
U8  BQ25895RTWR  [VQFN50P400X400X100-24N]  41.53,48.11 180 top
U9  [GL827L_SSOP]  22.88,58.86 180 top
U10  DRV2603  [WQFN-10]  45.63,36.41 270 top
U$1  AUDIO_AMP_PIC  [AUDIO_AMP_PIC]  57.38,25.39 180 top
U$2  INDUCTOR_SMALL  [INDUCTOR_SMALL]  26.58,48.31 0 top
U$3  1MM_PIC_PROGRAMING_HEADER  [1MM_PIC-PROGRAMING_HEADER]  56.72,36.74 180 top
U$4  SWITCHSTICK_BREAKOUT  [SWITCHSTICK_BREAKOUT]  71.68,27.31 180 top
U$5  SWITCHSTICK_BREAKOUT  [SWITCHSTICK_BREAKOUT]  5.32,12.29 90 top
U$6  TPS82085  [SON65P280X300X133-9N]  14.13,48.36 0 top
U$7  AUDIO_AMP_PIC  [AUDIO_AMP_PIC]  6.91,26.67 315 top
U$8  1MM_PIC_PROGRAMING_HEADER  [1MM_PIC-PROGRAMING_HEADER]  11.34,27 270 top
U$9  RK10J11R001Y  [RK10J11R001Y]  75.88,18.41 270 top
U$10  LMZM23601  [MODULE_LMZM23600SILR]  68.28,65.26 270 top
U$11  EVQ-P7J01P  [EVQ-P7J01P]  69.73,72.25 0 top
U$12  EVQ-P7J01P  [EVQ-P7J01P]  7.37,72.25 0 top
U$13  MOLEX_0541020164MOLEX  [MOLEX_0541020164MOLEX]  48.05,68.55 270 bottom
U$14  MX_WII  [MX_WII]  65.55,10.19 90 bottom
U$15  TFE20  [TFE20]  62.43,21.35 0 bottom
U$16  EVQ-P7J01P  [EVQ-P7J01P]  70.51,75.36 0 bottom
U$17  EVQ-P7J01P  [EVQ-P7J01P]  6.33,75.36 0 bottom
U$18  1MM_PIC_PROGRAMING_HEADER  [1MM_PIC-PROGRAMING_HEADER]  37.33,20.71 90 top
U$27  VOLTAGE_PAD  [VOLTAGE_PAD]  31.98,51.76 180 top
U$28  VOLTAGE_PAD  [VOLTAGE_PAD]  35.83,51.71 180 top
U$40  WII_VIA  [WII_VIA]  57.56,0.67 180 top
U$41  WII_VIA  [WII_VIA]  21.27,0.67 180 top
U$42  WII_VIA  [WII_VIA]  20.41,0.67 180 top
U$44  HP_JACK  [HP_JACK]  41.84,2.62 90 top
U$45  STL6P3LLH6  [POWERFLAT_3.3X3.3]  61.87,60.42 90 top
U$46  STL6P3LLH6  [POWERFLAT_3.3X3.3]  54.57,60.42 90 top
U$49  INDUCTOR_LARGE  [INDUCTOR_BIG]  33.11,42.36 180 top
U$50  TPS82085  [SON65P280X300X133-9N]  4.13,36.86 0 top
U$51  TPS82085  [SON65P280X300X133-9N]  14.13,40.36 0 top
U$52  TPS82085  [SON65P280X300X133-9N]  4.13,44.86 0 top
WS  PTR1TP09R  [TP09R]  60.78,0.96 0 top
X  TL3315NF100Q  [TL3315NF100Q]  18.17,54.65 0 bottom
Y  TL3315NF100Q  [TL3315NF100Q]  25.09,47.65 0 bottom
Y1  ECS-120-13-30B-AEM-TR  [XTAL_ECS-120-13-30B-AEM-TR]  20.28,55.56 180 top

## Library data of the parts
1V 1V8 1V15 3V3 GND GND(WII) GND(WII)1 = wirepad
3V3_SCREEN BT_DATA1 BT_DATA2 C D+ D- DAT1-DAT4 MC S SCL SD SDA T+ T- TP1-TP4 TP6 TP7 WS = testpad
A B DD DL DR DU START START2 X Y = TL3315NF100Q; AVAILABILITY: Warning; DESCRIPTION: Tactile Switch SPST-NO Top Actuated Surface Mount; DIGIKEY-PURCHASE-URL: https://snapeda.com/shop?store=DigiKey&id=289310; MF: E-Switch; MOUSER-PURCHASE-URL: https://snapeda.com/shop?store=Mouser&id=289310; MP: TL3315NF100Q; PACKAGE: None; PRICE: None
C1-C3 C12 C20-C23 C27-C29 C37 C39-C41 C43-C46 = SparkFun-Capacitors; PROD_ID: CAP-11625
C4-C11 C13-C15 = SparkFun-Capacitors; PROD_ID: CAP-08390
C16-C19 C30 C31 C33 = USB Board; PROD_ID: CAP-00868
C24 C25 C35 C36 C38 C42 C47-C51 C54-C59 R3 R17 R18 R20 R26 R29-R35 R42-R45 = resistor
C26 C32 C34 = SparkFun-Capacitors; PROD_ID: CAP-00810
C52 C53 = SparkFun-Capacitors@1
CHRG_LED CHRG_RESISTOR R1 R2 R5 R7 R8 R13 R15 R19 = SparkFun-Resistors; PROD_ID: RES-07856
CR1 = WiiSPii; BUILT_BY: EMA_UL_Team; MANUFACTURER_PART_NUMBER: BAT60JFILM; SOURCELIBRARY: StMicro_2011-06-07; VENDOR: STMicroelectronics
D1 = diode
D2 = samacsys; DESCRIPTION: STMicroelectronics ESDA25W Dual Uni-Directional TVS Diode Array, 400W peak, 3-Pin SOT-323; HEIGHT: 1.1mm; MANUFACTURER_NAME: STMicroelectronics; MANUFACTURER_PART_NUMBER: ESDA25W; MOUSER_PART_NUMBER: 511-ESDA25W; MOUSER_PRICE-STOCK: https://www.mouser.com/Search/Refine.aspx?Keyword=511-ESDA25W; RS_PART_NUMBER: 0250101; RS_PRICE-STOCK: http://uk.rs-online.com/web/p/products/0250101
D3 = samacsys; DESCRIPTION: STMicroelectronics ESDA25P35-1U1M, Uni-Directional TVS Diode, 1400W, 2-Pin QFN; HEIGHT: 0mm; MANUFACTURER_NAME: STMicroelectronics; MANUFACTURER_PART_NUMBER: ESDA25P35-1U1M; MOUSER_PART_NUMBER: 511-ESDA25P35-1U1M; MOUSER_PRICE-STOCK: https://www.mouser.com/Search/Refine.aspx?Keyword=511-ESDA25P35-1U1M; RS_PART_NUMBER: 1639774P; RS_PRICE-STOCK: http://uk.rs-online.com/web/p/products/1639774P
D4 = LTST-C19HE1WT; DESCRIPTION: Red, Green, Blue (RGB) 624nm Red, 525nm Green, 470nm Blue LED Indication - Discrete 2.1V Red, 3.35V Green, 3.35V Blue 0606 (1616 Metric); DIGI-KEY_PART_NUMBER: 160-2162-1-ND; MF: Lite-On Inc.; MP: LTST-C19HE1WT; PACKAGE: 0606 Lite-On; PURCHASE-URL: https://pricing.snapeda.com/search/part/LTST-C19HE1WT/?ref=eda
DATA = testpad; TP_SIGNAL_NAME: D
HS1 HS2 U$1 U$4 U$5 U$7 = My_Stuff
J1 = BK-870; DESCRIPTION: BATTERY RETAINER COIN 10MM SMD; MF: MPD (Memory Protection Devices); MP: BK-870; PACKAGE: None; PURCHASE-URL: https://pricing.snapeda.com/search/part/BK-870/?ref=eda
J2 = 12401598E4_2A; AVAILABILITY: Warning; DESCRIPTION: USB-C (USB TYPE-C) USB 3.2 Gen 2 (USB 3.1 Gen 2, Superspeed + (USB 3.1)) Receptacle Connector 24 Position Surface Mount, Right Angle; Through Hole; MF: Amphenol ICC (Commercial Products); MP: 12401598E4#2A; PACKAGE: None; PRICE: None; PURCHASE-URL: https://pricing.snapeda.com/search/part/12401598E4#2A/?ref=eda
J3 = 5025700893; DESCRIPTION: 10 (8 + 2) Position Card Connector Secure Digital - microSD™ Surface Mount, Right Angle Gold; DIGI-KEY_PART_NUMBER: WM19093CT-ND; DIGIKEY-PURCHASE-URL: https://snapeda.com/shop?store=DigiKey&id=379523; MF: Molex; MP: 5025700893; PACKAGE: None
LRA = jumper
M+ = testpad; TP_SIGNAL_NAME: M+
M- = testpad; TP_SIGNAL_NAME: M-
MP = testpad; TP_SIGNAL_NAME: MP
R4 R12 R21 R25 R36 = SparkFun-Resistors; PROD_ID: RES-07828
R6 R10 R14 R16 R37-R41 R46-R49 = resistor; SPICEPREFIX: R
R9 = SparkFun-Resistors; PROD_ID: RES-07869
R11 = SparkFun-Resistors; PROD_ID: RES-07853
R22-R24 = SparkFun-Resistors; PROD_ID: RES-07849
RS+ U$3 U$8 U$18 U$27 U$28 U$40-U$42 U$44 = My Stuff
S1 = JSM08011SAQNR; ARROW_PART_NUMBER: JSM08011SAQNR; DESCRIPTION: SUB-MINIATURE SLIDE SWITCH; HEIGHT: 2.1mm; MANUFACTURER_NAME: C & K COMPONENTS; MANUFACTURER_PART_NUMBER: JSM08011SAQNR; MOUSER_PART_NUMBER: 611-JSM08011SAQNR; MOUSER_PRICE-STOCK: https://www.mouser.co.uk/ProductDetail/CK/JSM08011SAQNR?qs=LgMIjt8LuD%252BuuitC%252BiJuLQ%3D%3D
U0 U$45 U$46 = LCD_Driver
U1 = My Stuff; MANUFACTURER_PART_NUMBER: LM49450SQNOPB; VENDOR: Texas Instruments
U2 = samacsys; DESCRIPTION: 8-bit Microcontrollers - MCU 32KB Flash, 2KB RAM, 256B EEPROM, 12-bit ADC2, Vector Interrupts, DMA, MAP, DIA, DAC, Comp, PWM, CWG, HLT, WWDT, SCAN/CRC, ZCD, PPS, UART, SPI/I2C, IDLE/DOZE/PMD; HEIGHT: 1mm; MANUFACTURER_NAME: Microchip; MANUFACTURER_PART_NUMBER: PIC18F25K42-I/ML; MOUSER_PART_NUMBER: 579-PIC18F25K42-I/ML; MOUSER_PRICE-STOCK: https://www.mouser.com/Search/Refine.aspx?Keyword=579-PIC18F25K42-I%2FML
U3 = My Stuff; MANUFACTURER_PART_NUMBER: XC6204B252MRG; VENDOR: Torex Semiconductor
U4 = TS3USB221A; AVAILABILITY: Unavailable; DESCRIPTION: ESD Protected High-Speed USB 2.0 _480-Mbps_ 1: 2 Multiplexer/Demultiplexer Switch; MF: Texas Instruments; MP: TS3USB221A; PACKAGE: None; PRICE: None
U5 = LD3985G33R; AVAILABILITY: Unavailable; DESCRIPTION: IC REG LIN 3.3V 150MA TSOT23-5; MF: STMicroelectronics; MP: LD3985G33R; PACKAGE: SOT-23-5 STMicroelectronics; PRICE: None
U6 = Wii_PMS; BUILT_BY: EMA_UL_Team; COPYRIGHT: Copyright (C) 2018 Accelerated Designs. All rights reserved; MANUFACTURER_PART_NUMBER: TPS61232DRCR; VENDOR: Texas Instruments
U7 = TPS2111APW; AVAILABILITY: Unavailable; DESCRIPTION: Power Muxes and Current Limited Switches Autoswitching Power Mux; MF: Texas Instruments; MP: TPS2111APW; PACKAGE: TSSOP-8 Texas Instruments; PRICE: None
U8 = bq25895; AVAILABILITY: Unavailable; DESCRIPTION: Single Cell 5A Fast Charger MaxCharge_TM_ Technology for High Input Voltage and 3.1A Boost 24-WQFN -40 to 85; MF: Texas Instruments; MP: BQ25895RTWR; PACKAGE: WQFN-24 Texas Instruments; PRICE: None
U9 U$9 U$13-U$15 = WiiSPii
U10 = drv2603
U$2 U$49 = Wii PMS
U$6 U$50-U$52 = bq25895
U$10 = MODULE_LMZM23600SILR
U$11 U$12 U$16 U$17 = EVQ-P7J01P
Y1 = ECS-120-13-30B-AEM-TR; ARROW_ELECTRONICS-PURCHASE-URL: https://snapeda.com/shop?store=Arrow+Electronics&id=2751400; DESCRIPTION: 12MHz ±25ppm Crystal 13pF 80 Ohms 4-SMD, No Lead; DIGI-KEY_PART_NUMBER: XC2678CT-ND; MF: ECS Inc.; MOUSER-PURCHASE-URL: https://snapeda.com/shop?store=Mouser&id=2751400; MP: ECS-120-13-30B-AEM-TR; PACKAGE: SMD-4 ECS International

## Nets
1V: 1V.1 C29.2 R30.2 U$6.8
1V8: 1V8.1 C13.1 C43.2 R1.1 R2.1 R32.2 TP6.TP U1.11 U$1.VDD U$3.2 U$9.1 U$52.8
1V15: 1V15.1 C27.2 R18.2 U$51.8
2V5: C9.1 C11.1 C15.1 U1.28 U1.32 U3.5
3.3V: C49.1 R6.2 R38.2 R39.2 R40.2 R41.2 U9.3 U9.7 U9.11
3V3: 3V3.1 3V3_SCREEN.TP C5.2 C8.2 C14.1 C25.1 C45.2 C55.2 C57.2 LRA.2 R16.2 R21.1 R34.2 S.TP U1.10 U1.16 U1.18 U1.24 U2.17 U3.1 U3.3 U4.9 U$4.4 U$5.4 U$13.6 U$13.7 U$13.13 U$14.17 U$14.24 U$14.25 U$14.27 U$18.2 U$50.8
3V3_LDO: C26.2 C31.2 U4.10 U5.5
5V: C30.2 C33.2 C47.1 U5.1 U5.3 U7.7 U9.12
5V_BUS: C34.1 C53.1 U7.6 U$10.6 U$10.7
5V_REG: C1.1 C2.1 C3.1 C32.2 C35.2 C36.2 HS1.P$1 HS2.P$1 R23.1 TP7.TP U6.3 U6.4 U6.7 U7.8
A: A.3 A.4 U2.3
B: B.3 B.4 U2.4
B+: C37.2 U8.13 U8.14 U$28.1
BLUE: R13.2 U$7.RC2
BTST: C58.2 U8.21
BUTTON: S1.1 U$7.RA5
C: C.TP U1.7
C1: C4.1 U1.31
CC1: D2.1 J2.A5 U0.1 U0.2
CC2: D2.2 J2.B5 U0.4 U0.5
CHRG: C21.2 R36.2 U8.1 U$46.5 U$46.6 U$46.7
CHRG_LED: CHRG_RESISTOR.1 U$7.RA2
CX: U2.27 U$5.5
CY: U2.28 U$5.2
D1: BT_DATA1.TP U$13.10
D1_N [USB 2.0 Differential Pair]: J2.A7 J2.B7 U4.2
D1_P [USB 2.0 Differential Pair]: J2.A6 J2.B6 U4.1
D2: BT_DATA2.TP U$13.11
D2_N [USB 2.0 Differential Pair]: R37.2 U4.7
D2_P [USB 2.0 Differential Pair]: R10.2 U4.8
DAT1: DAT1.TP U$14.11
DAT2: DAT2.TP U$14.12
DAT3: DAT3.TP U$14.13
DAT4: DAT4.TP U$14.14
DD: DD.3 DD.4 U2.15
DL: DL.3 DL.4 U2.19
DR: DR.3 DR.4 U2.18
DU: DU.3 DU.4 U2.14
EN: R19.2 U6.9 U$6.1 U$7.RC5 U$50.1 U$51.1 U$52.1
GND: A.1 A.2 B.1 B.2 C1.2 C2.2 C3.2 C5.1 C6.1 C7.1 C8.1 C9.2 C10.2 C11.2 C12.2 C13.2 C14.2 C15.2 C16.1 C17.1 C18.1 C19.1 C20.1 C21.1 C22.2 C23.1 C24.2 C25.2 C26.1 C27.1 C28.1 C29.1 C30.1 C31.1 C32.1 C33.1 C34.2 C35.1 C36.1 C37.1 C38.1 C39.1 C40.1 C41.1 C42.2 C43.1 C44.1 C45.1 C46.1 C47.2 C48.2 C49.2 C50.1 C51.1 C52.1 C53.2 C54.1 C55.1 C56.2 C57.1 C59.2 CHRG_LED.2 D2.3 D3.1 DD.1 DD.2 DL.1 DL.2 DR.1 DR.2 DU.1 DU.2 GND(WII)1.1 GND(WII).1 GND.1 HS1.P$2 HS2.P$2 J1.2 J2.A1 J2.A12 J2.B1 J2.B12 J2.SH1 J2.SH2 J2.SH3 J2.SH4 J3.6 J3.9 R4.1 R14.1 R15.1 R19.1 R21.2 R22.2 R24.2 R25.1 R26.1 R29.1 R31.1 R33.1 R35.1 R43.1 R45.1 R48.2 R49.2 S1.3 START2.1 START2.2 START.1 START.2 U0.10 U0.25 U1.2 U1.4 U1.12 U1.21 U1.25 U1.33 U2.5 U2.16 U3.2 U4.5 U4.6 U5.2 U6.11 U7.2 U7.5 U8.8 U8.9 U8.17 U8.18 U8.25 U9.6 U9.14 U10.5 U10.8 U10.10 U$1.THERM U$1.VSS U$3.3 U$4.1 U$4.SHIELD U$4.SHIELD1 U$5.1 U$5.SHIELD U$5.SHIELD1 U$6.5 U$6.6 U$6.9 U$6.P$1 U$6.P$2 U$6.P$3 U$7.THERM U$7.VSS U$8.3 U$9.3 U$10.1 U$10.2 U$10.11 U$11.3 U$11.4 U$12.3 U$12.4 U$13.1 U$13.8 U$13.9 U$13.16 U$14.4 U$14.16 U$16.3 U$16.4 U$17.3 U$17.4 U$18.3 U$27.1 U$44.HP_1 U$50.5 U$50.6 U$50.9 U$50.P$1 U$50.P$2 U$50.P$3 U$51.5 U$51.6 U$51.9 U$51.P$1 U$51.P$2 U$51.P$3 U$52.5 U$52.6 U$52.9 U$52.P$1 U$52.P$2 U$52.P$3 X.1 X.2 Y1.2 Y1.4 Y.1 Y.2
GREEN: R7.2 U$7.RC3
HPL: U1.29 U$44.HP_2
HPR: U1.27 U$44.HP_3
HPS: U1.26 U$1.RC2 U$44.HP_4
ICSPCLK: U$7.ICSPCLK U$8.5
ICSPCLK1: U$1.ICSPCLK U$3.5
ICSPDAT: U$7.ICSPDAT U$8.4
ICSPDAT1: U$1.ICSPDAT U$3.4
L_ADC: R44.1 R45.2 U2.12
L_ANALOG: HS2.P$3 R44.2
LS+: U1.19 U$42.1
LS-: U1.20 U$41.1
LT: U2.13 U$11.1 U$11.2
M+: M+.TP U10.9
M-: M-.TP U10.6
MC: MC.TP U1.8
MCLR: U$7.MCLR U$8.1
MCLR1: R17.2 U2.26 U$18.1
MCLR2: U$1.MCLR U$3.1
MP: C42.1 MP.TP U10.7
N$1: C7.2 U1.17
N$3: U6.1 U6.2 U$2.1
N$5: D4.2 R7.1
N$6: R4.2 U0.12
N$7: R8.1 U0.18
N$8: C19.2 U0.23
N$9: R11.1 U0.16
N$10: R11.2 R12.1 U$45.4 U$46.4
N$11: D4.1 R5.1
N$12: D4.3 R13.1
N$13: CHRG_LED.1 CHRG_RESISTOR.2
N$14: C56.1 U$14.23 U$15.P$1
N$15: C59.1 U$14.22 U$15.P$2
N$16: R36.1 U0.9
N$18: LRA.1 R26.2 U10.3
N$19: CR1.2 R47.2
N$21: D-.TP U4.4
N$22: D+.TP U4.3
N$23: R22.1 U7.4
N$24: R25.2 U0.6
N$25: C18.2 U0.21
N$26: C16.2 D1.3 R8.2 R9.1
N$27: R18.1 R29.2 U$51.7
N$28: R46.1 R48.1 U8.11
N$29: R49.1 U8.10
N$30: C10.1 U1.30
N$31: C48.1 R6.1 U9.13
N$34: C54.2 CR1.1 U$14.26
N$35: U$1.RA5 U$9.2
N$36: J1.1 J1.3 R47.1
N$44: DATA.TP U2.20
N$46: C24.1 R16.1 R17.1
N$52: R14.2 U9.10
N$53: R30.1 R31.2 U$6.7
N$54: R10.1 U9.8
N$55: R32.1 R33.2 U$52.7
N$56: R37.1 U9.9
N$57: R34.1 R35.2 U$50.7
N$68: C50.2 U9.4 Y1.1
N$69: J3.1 R40.1 U9.25
N$70: J3.2 R41.1 U9.24
N$71: J3.3 U9.22
N$73: J3.5 U9.20
N$74: J3.8 R38.1 U9.16
N$75: J3.7 R39.1 U9.17
N$76: C51.2 U9.5 Y1.3
PGC: U2.24 U$18.5
PGD: U2.25 U$18.4
PIN1: C4.2 U1.1
PMOSO: J3.4 U9.2
R_ADC: R42.1 R43.2 U2.11
R_ANALOG: HS1.P$3 R42.2
R_EN: U2.22 U10.1
R_PWM: U2.21 U10.2
RED: R5.2 U$7.RC4
REF: C6.2 U1.13
REGN: C38.2 R46.2 U8.22
RS+: RS+.1 U1.23
RS-: U1.22 U$40.1
RT: U2.10 U$12.1 U$12.2
S: START2.3 START2.4 START.3 START.4 U2.9
SCL: R3.1 SCL.TP TP2.TP TP4.TP U0.7 U8.5 U$7.RC0
SCL2: R1.2 U1.9 U$1.RC0
SD: SD.TP U1.6
SD_CDZ: J3.10 U9.15
SDA: R20.1 SDA.TP TP1.TP TP3.TP U0.8 U8.6 U$7.RC1
SDA2: R2.2 U1.3 U$1.RC1
SW: C58.1 U8.19 U8.20 U$49.1
SX: U2.1 U$4.5
SY: U2.2 U$4.2
SYNC: U$4.3 U$13.12
VBUS: C52.2 D1.1 D3.2 J2.A4 J2.A9 J2.B4 J2.B9 R9.2 U$10.3 U$10.4 U$45.5 U$45.6 U$45.7
VCC: C17.2 R12.2 U0.24 U$45.1 U$45.2 U$45.3 U$46.1 U$46.2 U$46.3
VSNS: R23.2 R24.1 U7.3
VSYS: C12.1 C20.2 C22.1 C23.2 C28.2 C39.2 C40.2 C41.2 C44.2 C46.2 D4.4 R3.2 R20.2 T+.TP U0.22 U6.10 U8.15 U8.16 U$2.2 U$6.3 U$6.4 U$7.VDD U$8.2 U$49.2 U$50.3 U$50.4 U$51.3 U$51.4 U$52.3 U$52.4
VTEMP: R15.2 T-.TP U$7.RA4
WS: U1.5 WS.TP
X: U2.6 X.3 X.4
Y: U2.7 Y.3 Y.4
Z: U2.8 U$17.1 U$17.2
Z2: U2.23 U$16.1 U$16.2